# Altium PCB S52最小系统.PcbDoc (part 4 of 9)
Units mm, origin at the board's own origin, x right, y up, seen from the top; angles counter-clockwise.
Board outline 152.4 x 101.6 mm, 2 copper layers (Top Layer, Bottom Layer); 29 components, 53 nets, 176 pads, 2 vias.
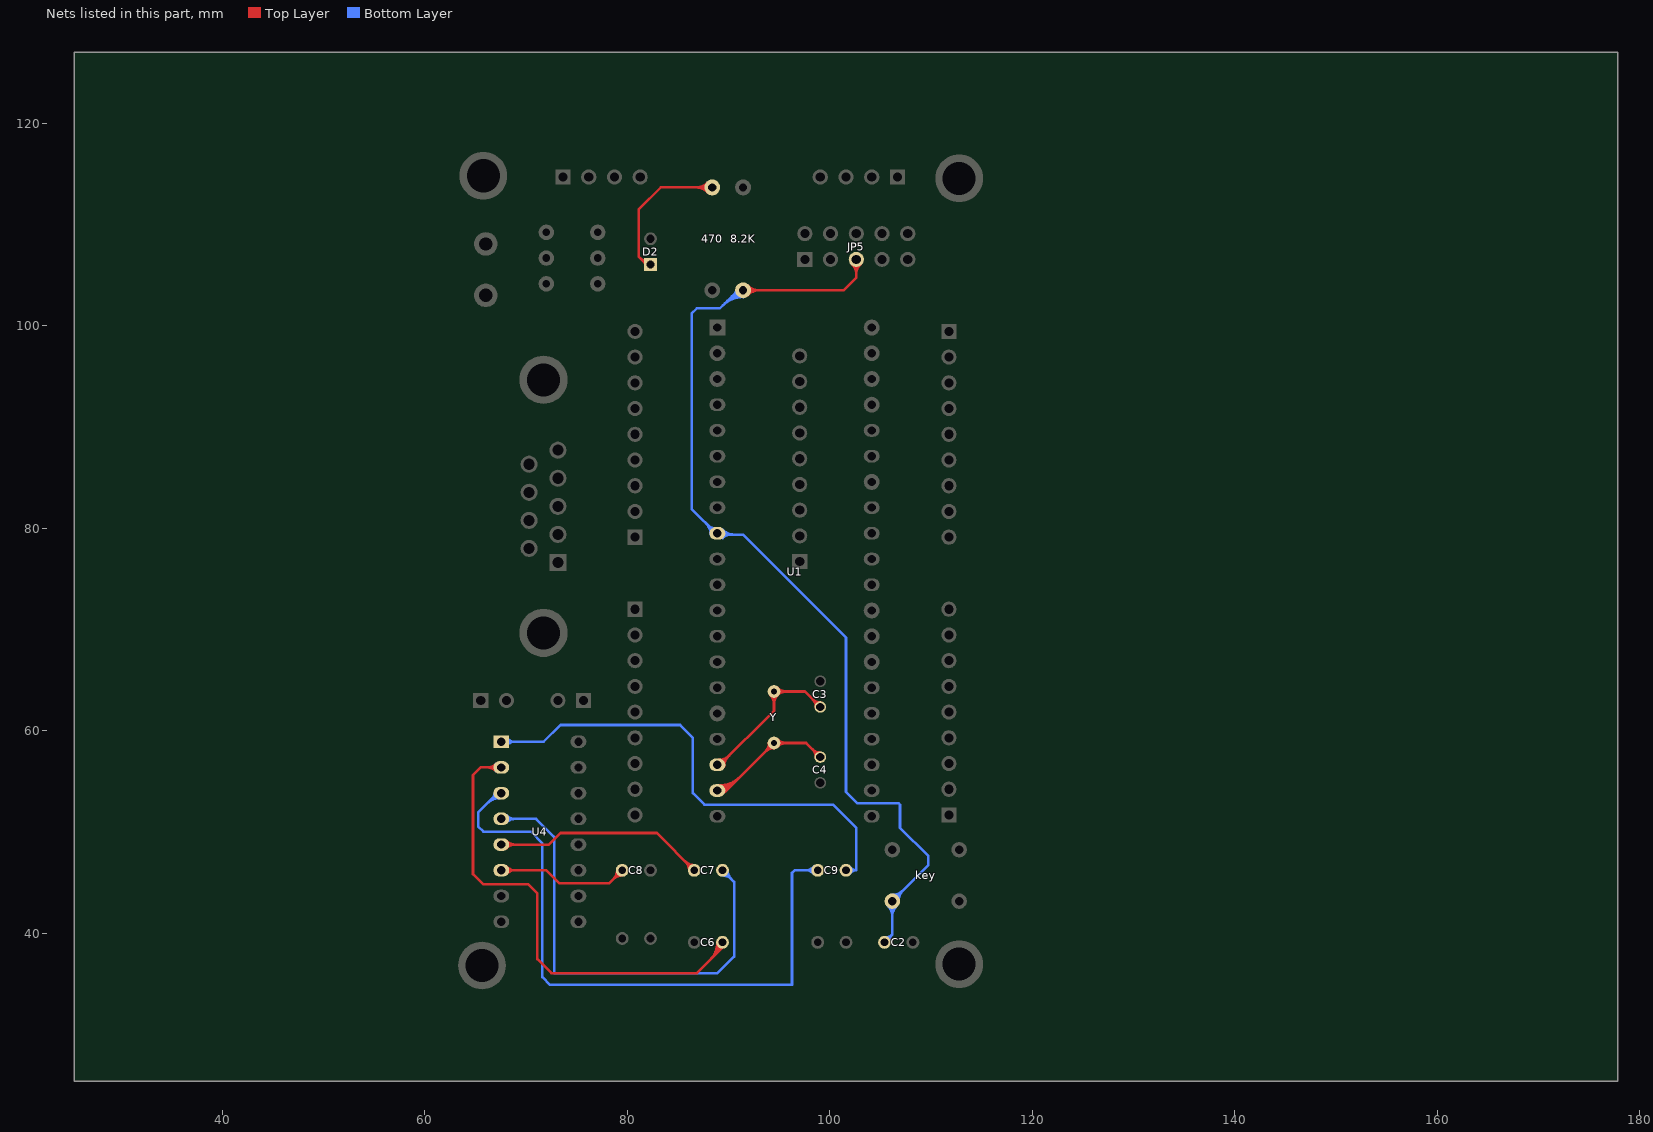
[diagram p4: the nets of this part, all layers, seen from the top]

## Via types
v1: diameter 1.27, hole 0.711, Top Layer to Bottom Layer, 2 vias

## Nets (pads, with @x,y where several pads share a name; then routed paths per layer and width w, separated by ;. In a path a pad name is that pad's centre, name@x,y a point inside that pad or via, vN(x,y) a via of type N, cw(c..) or ccw(c..) an arc to the next point about the centre after c; other vN are vias at no path point) (continued)
NetC2_2: 8.2K.1 C2.2 JP5.5 key.2@106.172,43.18 U1.9 | length 361.3
  Top Layer w0.254: 8.2K.1@91.441,103.501 101.342,103.501 102.616,104.775 JP5.5@102.616,106.553 ; 8.2K.1@91.728,103.214 cw(c92.422,102.52) 92.422,103.501 ; 8.2K.1@91.728,103.214 cw(c92.422,102.52) 92.422,103.501 ; 8.2K.1@91.728,103.214 cw(c92.422,102.52) 92.422,103.501 ; 8.2K.1@91.728,103.214 cw(c92.422,102.52) 92.422,103.501 ; 8.2K.1@91.728,103.214 cw(c92.422,102.52) 92.422,103.501 ; 8.2K.1@91.728,103.214 cw(c92.422,102.52) 92.422,103.501 ; 8.2K.1@91.728,103.214 cw(c92.422,102.52) 92.422,103.501 ; 8.2K.1@91.728,103.214 cw(c92.422,102.52) 92.422,103.501 ; 8.2K.1@91.728,103.214 cw(c92.422,102.52) 92.422,103.501 ; 8.2K.1@91.728,103.214 cw(c92.422,102.52) 92.422,103.501 ; 8.2K.1@91.728,103.789 ccw(c92.422,104.482) 92.422,103.501 ; 8.2K.1@91.728,103.789 ccw(c92.422,104.482) 92.422,103.501 ; 8.2K.1@91.728,103.789 ccw(c92.422,104.482) 92.422,103.501 ; 8.2K.1@91.728,103.789 ccw(c92.422,104.482) 92.422,103.501 ; 8.2K.1@91.728,103.789 ccw(c92.422,104.482) 92.422,103.501 ; 8.2K.1@91.728,103.789 ccw(c92.422,104.482) 92.422,103.501 ; 8.2K.1@91.728,103.789 ccw(c92.422,104.482) 92.422,103.501 ; 8.2K.1@91.728,103.789 ccw(c92.422,104.482) 92.422,103.501 ; 8.2K.1@91.728,103.789 ccw(c92.422,104.482) 92.422,103.501 ; 8.2K.1@91.728,103.789 ccw(c92.422,104.482) 92.422,103.501 ; 8.2K.1@91.908,103.034 cw(c93.035,101.907) 93.035,103.501 ; 8.2K.1@91.908,103.034 cw(c93.035,101.907) 93.035,103.501 ; 8.2K.1@91.908,103.034 cw(c93.035,101.907) 93.035,103.501 ; 8.2K.1@91.908,103.034 cw(c93.035,101.907) 93.035,103.501 ; 8.2K.1@91.908,103.034 cw(c93.035,101.907) 93.035,103.501 ; 8.2K.1@91.908,103.034 cw(c93.035,101.907) 93.035,103.501 ; 8.2K.1@91.908,103.034 cw(c93.035,101.907) 93.035,103.501 ; 8.2K.1@91.908,103.034 cw(c93.035,101.907) 93.035,103.501 ; 8.2K.1@91.908,103.034 cw(c93.035,101.907) 93.035,103.501 ; 8.2K.1@91.908,103.034 cw(c93.035,101.907) 93.035,103.501 ; 8.2K.1@91.908,103.968 ccw(c93.035,105.096) 93.035,103.501 ; 8.2K.1@91.908,103.968 ccw(c93.035,105.096) 93.035,103.501 ; 8.2K.1@91.908,103.968 ccw(c93.035,105.096) 93.035,103.501 ; 8.2K.1@91.908,103.968 ccw(c93.035,105.096) 93.035,103.501 ; 8.2K.1@91.908,103.968 ccw(c93.035,105.096) 93.035,103.501 ; 8.2K.1@91.908,103.968 ccw(c93.035,105.096) 93.035,103.501 ; 8.2K.1@91.908,103.968 ccw(c93.035,105.096) 93.035,103.501 ; 8.2K.1@91.908,103.968 ccw(c93.035,105.096) 93.035,103.501 ; 8.2K.1@91.908,103.968 ccw(c93.035,105.096) 93.035,103.501 ; 8.2K.1@91.908,103.968 ccw(c93.035,105.096) 93.035,103.501 ; JP5.5@102.175,106.112 cw(c101.112,105.049) 102.616,105.049 ; JP5.5@102.175,106.112 cw(c101.112,105.049) 102.616,105.049 ; JP5.5@102.175,106.112 cw(c101.112,105.049) 102.616,105.049 ; JP5.5@102.175,106.112 cw(c101.112,105.049) 102.616,105.049 ; JP5.5@102.175,106.112 cw(c101.112,105.049) 102.616,105.049 ; JP5.5@102.175,106.112 cw(c101.112,105.049) 102.616,105.049 ; JP5.5@102.175,106.112 cw(c101.112,105.049) 102.616,105.049 ; JP5.5@102.175,106.112 cw(c101.112,105.049) 102.616,105.049 ; JP5.5@102.175,106.112 cw(c101.112,105.049) 102.616,105.049 ; JP5.5@102.175,106.112 cw(c101.112,105.049) 102.616,105.049 ; JP5.5@102.355,106.292 cw(c101.725,105.662) 102.616,105.662 ; JP5.5@102.355,106.292 cw(c101.725,105.662) 102.616,105.662 ; JP5.5@102.355,106.292 cw(c101.725,105.662) 102.616,105.662 ; JP5.5@102.355,106.292 cw(c101.725,105.662) 102.616,105.662 ; JP5.5@102.355,106.292 cw(c101.725,105.662) 102.616,105.662 ; JP5.5@102.355,106.292 cw(c101.725,105.662) 102.616,105.662 ; JP5.5@102.355,106.292 cw(c101.725,105.662) 102.616,105.662 ; JP5.5@102.355,106.292 cw(c101.725,105.662) 102.616,105.662 ; JP5.5@102.355,106.292 cw(c101.725,105.662) 102.616,105.662 ; JP5.5@102.355,106.292 cw(c101.725,105.662) 102.616,105.662 ; 102.616,105.049 cw(c104.12,105.049) JP5.5@103.057,106.112 ; 102.616,105.049 cw(c104.12,105.049) JP5.5@103.057,106.112 ; 102.616,105.049 cw(c104.12,105.049) JP5.5@103.057,106.112 ; 102.616,105.049 cw(c104.12,105.049) JP5.5@103.057,106.112 ; 102.616,105.049 cw(c104.12,105.049) JP5.5@103.057,106.112 ; 102.616,105.049 cw(c104.12,105.049) JP5.5@103.057,106.112 ; 102.616,105.049 cw(c104.12,105.049) JP5.5@103.057,106.112 ; 102.616,105.049 cw(c104.12,105.049) JP5.5@103.057,106.112 ; 102.616,105.049 cw(c104.12,105.049) JP5.5@103.057,106.112 ; 102.616,105.049 cw(c104.12,105.049) JP5.5@103.057,106.112 ; 102.616,105.662 cw(c103.507,105.662) JP5.5@102.877,106.292 ; 102.616,105.662 cw(c103.507,105.662) JP5.5@102.877,106.292 ; 102.616,105.662 cw(c103.507,105.662) JP5.5@102.877,106.292 ; 102.616,105.662 cw(c103.507,105.662) JP5.5@102.877,106.292 ; 102.616,105.662 cw(c103.507,105.662) JP5.5@102.877,106.292 ; 102.616,105.662 cw(c103.507,105.662) JP5.5@102.877,106.292 ; 102.616,105.662 cw(c103.507,105.662) JP5.5@102.877,106.292 ; 102.616,105.662 cw(c103.507,105.662) JP5.5@102.877,106.292 ; 102.616,105.662 cw(c103.507,105.662) JP5.5@102.877,106.292 ; 102.616,105.662 cw(c103.507,105.662) JP5.5@102.877,106.292
  Bottom Layer w0.254: 8.2K.1@91.441,103.501 90.928,103.501 89.154,101.727 86.868,101.727 86.36,101.219 86.36,81.91 88.896,79.374 91.441,79.374 101.6,69.215 101.6,53.975 102.743,52.832 106.807,52.832 106.934,52.705 106.934,50.419 109.728,47.625 109.728,46.736 key.2@106.172,43.18 106.172,39.878 ; C2.2@105.41,39.116 106.172,39.878 ; 87.769,80.501 cw(c86.641,79.374) U1.9@88.236,79.374 ; 87.769,80.501 cw(c86.641,79.374) U1.9@88.236,79.374 ; 87.769,80.501 cw(c86.641,79.374) U1.9@88.236,79.374 ; 87.769,80.501 cw(c86.641,79.374) U1.9@88.236,79.374 ; 87.769,80.501 cw(c86.641,79.374) U1.9@88.236,79.374 ; 87.769,80.501 cw(c86.641,79.374) U1.9@88.236,79.374 ; 87.859,80.412 cw(c86.948,79.501) U1.9@88.236,79.501 ; 87.859,80.412 cw(c86.948,79.501) U1.9@88.236,79.501 ; 87.859,80.412 cw(c86.948,79.501) U1.9@88.236,79.501 ; 87.859,80.412 cw(c86.948,79.501) U1.9@88.236,79.501 ; 87.944,80.326 ccw(c88.734,81.116) U1.9@88.734,79.999 ; 87.944,80.326 ccw(c88.734,81.116) U1.9@88.734,79.999 ; 87.944,80.326 ccw(c88.734,81.116) U1.9@88.734,79.999 ; 87.944,80.326 ccw(c88.734,81.116) U1.9@88.734,79.999 ; 88.161,80.109 ccw(c88.734,80.682) U1.9@88.734,79.872 ; 88.161,80.109 ccw(c88.734,80.682) U1.9@88.734,79.872 ; 88.161,80.109 ccw(c88.734,80.682) U1.9@88.734,79.872 ; 88.161,80.109 ccw(c88.734,80.682) U1.9@88.734,79.872 ; 88.161,80.109 ccw(c88.734,80.682) U1.9@88.734,79.872 ; 88.161,80.109 ccw(c88.734,80.682) U1.9@88.734,79.872 ; 88.202,80.068 cw(c87.509,79.374) U1.9@88.49,79.374 ; 88.202,80.068 cw(c87.509,79.374) U1.9@88.49,79.374 ; 88.202,80.068 cw(c87.509,79.374) U1.9@88.49,79.374 ; 88.202,80.068 cw(c87.509,79.374) U1.9@88.49,79.374 ; 88.202,80.068 cw(c87.509,79.374) U1.9@88.49,79.374 ; 88.202,80.068 cw(c87.509,79.374) U1.9@88.49,79.374 ; 88.292,79.978 cw(c87.815,79.501) U1.9@88.49,79.501 ; 88.292,79.978 cw(c87.815,79.501) U1.9@88.49,79.501 ; 88.292,79.978 cw(c87.815,79.501) U1.9@88.49,79.501 ; 88.292,79.978 cw(c87.815,79.501) U1.9@88.49,79.501 ; U1.9@89.231,79.674 ccw(c89.954,80.397) 89.954,79.374 ; U1.9@89.231,79.674 ccw(c89.954,80.397) 89.954,79.374 ; U1.9@89.231,79.674 ccw(c89.954,80.397) 89.954,79.374 ; U1.9@89.231,79.674 ccw(c89.954,80.397) 89.954,79.374 ; U1.9@89.411,79.022 cw(c90.261,78.172) 90.261,79.374 ; U1.9@89.411,79.022 cw(c90.261,78.172) 90.261,79.374 ; U1.9@89.411,79.022 cw(c90.261,78.172) 90.261,79.374 ; U1.9@89.411,79.022 cw(c90.261,78.172) 90.261,79.374 ; U1.9@89.411,79.022 cw(c90.261,78.172) 90.261,79.374 ; U1.9@89.411,79.022 cw(c90.261,78.172) 90.261,79.374 ; U1.9@89.411,79.149 cw(c89.954,78.605) 89.954,79.374 ; U1.9@89.411,79.149 cw(c89.954,78.605) 89.954,79.374 ; U1.9@89.411,79.149 cw(c89.954,78.605) 89.954,79.374 ; U1.9@89.411,79.149 cw(c89.954,78.605) 89.954,79.374 ; U1.9@89.411,79.726 ccw(c90.261,80.576) 90.261,79.374 ; U1.9@89.411,79.726 ccw(c90.261,80.576) 90.261,79.374 ; U1.9@89.411,79.726 ccw(c90.261,80.576) 90.261,79.374 ; U1.9@89.411,79.726 ccw(c90.261,80.576) 90.261,79.374 ; U1.9@89.411,79.726 ccw(c90.261,80.576) 90.261,79.374 ; U1.9@89.411,79.726 ccw(c90.261,80.576) 90.261,79.374 ; U1.9@89.411,79.853 ccw(c90.567,81.01) 90.567,79.374 ; U1.9@89.411,79.853 ccw(c90.567,81.01) 90.567,79.374 ; U1.9@89.411,79.853 ccw(c90.567,81.01) 90.567,79.374 ; U1.9@89.411,79.853 ccw(c90.567,81.01) 90.567,79.374 ; 89.438,102.011 cw(c91.441,100.008) 8.2K.1@91.441,102.841 ; 89.438,102.011 cw(c91.441,100.008) 8.2K.1@91.441,102.841 ; 89.438,102.011 cw(c91.441,100.008) 8.2K.1@91.441,102.841 ; 89.438,102.011 cw(c91.441,100.008) 8.2K.1@91.441,102.841 ; 89.438,102.011 cw(c91.441,100.008) 8.2K.1@91.441,102.841 ; 89.438,102.011 cw(c91.441,100.008) 8.2K.1@91.441,102.841 ; 89.438,102.011 cw(c91.441,100.008) 8.2K.1@91.441,102.841 ; 89.438,102.011 cw(c91.441,100.008) 8.2K.1@91.441,102.841 ; 89.438,102.011 cw(c91.441,100.008) 8.2K.1@91.441,102.841 ; 89.438,102.011 cw(c91.441,100.008) 8.2K.1@91.441,102.841 ; 89.872,102.445 cw(c91.441,100.876) 8.2K.1@91.441,103.095 ; 89.872,102.445 cw(c91.441,100.876) 8.2K.1@91.441,103.095 ; 89.872,102.445 cw(c91.441,100.876) 8.2K.1@91.441,103.095 ; 89.872,102.445 cw(c91.441,100.876) 8.2K.1@91.441,103.095 ; 89.872,102.445 cw(c91.441,100.876) 8.2K.1@91.441,103.095 ; 89.872,102.445 cw(c91.441,100.876) 8.2K.1@91.441,103.095 ; 89.872,102.445 cw(c91.441,100.876) 8.2K.1@91.441,103.095 ; 89.872,102.445 cw(c91.441,100.876) 8.2K.1@91.441,103.095 ; 89.872,102.445 cw(c91.441,100.876) 8.2K.1@91.441,103.095 ; 89.872,102.445 cw(c91.441,100.876) 8.2K.1@91.441,103.095 ; 90.305,102.878 cw(c91.441,101.743) 8.2K.1@91.441,103.349 ; 90.305,102.878 cw(c91.441,101.743) 8.2K.1@91.441,103.349 ; 90.305,102.878 cw(c91.441,101.743) 8.2K.1@91.441,103.349 ; 90.305,102.878 cw(c91.441,101.743) 8.2K.1@91.441,103.349 ; 90.305,102.878 cw(c91.441,101.743) 8.2K.1@91.441,103.349 ; 90.305,102.878 cw(c91.441,101.743) 8.2K.1@91.441,103.349 ; 90.305,102.878 cw(c91.441,101.743) 8.2K.1@91.441,103.349 ; 90.305,102.878 cw(c91.441,101.743) 8.2K.1@91.441,103.349 ; 90.305,102.878 cw(c91.441,101.743) 8.2K.1@91.441,103.349 ; 90.305,102.878 cw(c91.441,101.743) 8.2K.1@91.441,103.349 ; 90.676,103.249 ccw(c90.424,103.501) 8.2K.1@90.781,103.501 ; 90.676,103.249 ccw(c90.424,103.501) 8.2K.1@90.781,103.501 ; 90.676,103.249 ccw(c90.424,103.501) 8.2K.1@90.781,103.501 ; 90.676,103.249 ccw(c90.424,103.501) 8.2K.1@90.781,103.501 ; 90.676,103.249 ccw(c90.424,103.501) 8.2K.1@90.781,103.501 ; 90.676,103.249 ccw(c90.424,103.501) 8.2K.1@90.781,103.501 ; 90.676,103.249 ccw(c90.424,103.501) 8.2K.1@90.781,103.501 ; 90.676,103.249 ccw(c90.424,103.501) 8.2K.1@90.781,103.501 ; 90.676,103.249 ccw(c90.424,103.501) 8.2K.1@90.781,103.501 ; 90.676,103.249 ccw(c90.424,103.501) 8.2K.1@90.781,103.501 ; C2.2@105.459,39.622 ccw(c105.543,40.507) 106.172,39.878 ; C2.2@105.459,39.622 ccw(c105.543,40.507) 106.172,39.878 ; C2.2@105.459,39.622 ccw(c105.543,40.507) 106.172,39.878 ; C2.2@105.459,39.622 ccw(c105.543,40.507) 106.172,39.878 ; C2.2@105.459,39.622 ccw(c105.543,40.507) 106.172,39.878 ; C2.2@105.459,39.622 ccw(c105.543,40.507) 106.172,39.878 ; C2.2@105.459,39.622 ccw(c105.543,40.507) 106.172,39.878 ; C2.2@105.459,39.622 ccw(c105.543,40.507) 106.172,39.878 ; C2.2@105.459,39.622 ccw(c105.543,40.507) 106.172,39.878 ; key.2@105.723,42.731 cw(c104.639,41.647) 106.172,41.647 ; key.2@105.723,42.731 cw(c104.639,41.647) 106.172,41.647 ; key.2@105.723,42.731 cw(c104.639,41.647) 106.172,41.647 ; key.2@105.723,42.731 cw(c104.639,41.647) 106.172,41.647 ; key.2@105.723,42.731 cw(c104.639,41.647) 106.172,41.647 ; key.2@105.723,42.731 cw(c104.639,41.647) 106.172,41.647 ; key.2@105.723,42.731 cw(c104.639,41.647) 106.172,41.647 ; key.2@105.723,42.731 cw(c104.639,41.647) 106.172,41.647 ; key.2@105.723,42.731 cw(c104.639,41.647) 106.172,41.647 ; key.2@105.903,42.911 cw(c105.252,42.26) 106.172,42.26 ; key.2@105.903,42.911 cw(c105.252,42.26) 106.172,42.26 ; key.2@105.903,42.911 cw(c105.252,42.26) 106.172,42.26 ; key.2@105.903,42.911 cw(c105.252,42.26) 106.172,42.26 ; key.2@105.903,42.911 cw(c105.252,42.26) 106.172,42.26 ; key.2@105.903,42.911 cw(c105.252,42.26) 106.172,42.26 ; key.2@105.903,42.911 cw(c105.252,42.26) 106.172,42.26 ; key.2@105.903,42.911 cw(c105.252,42.26) 106.172,42.26 ; key.2@105.903,42.911 cw(c105.252,42.26) 106.172,42.26 ; C2.2@105.916,39.165 cw(c106.801,39.249) 106.172,39.878 ; C2.2@105.916,39.165 cw(c106.801,39.249) 106.172,39.878 ; C2.2@105.916,39.165 cw(c106.801,39.249) 106.172,39.878 ; C2.2@105.916,39.165 cw(c106.801,39.249) 106.172,39.878 ; C2.2@105.916,39.165 cw(c106.801,39.249) 106.172,39.878 ; C2.2@105.916,39.165 cw(c106.801,39.249) 106.172,39.878 ; C2.2@105.916,39.165 cw(c106.801,39.249) 106.172,39.878 ; C2.2@105.916,39.165 cw(c106.801,39.249) 106.172,39.878 ; C2.2@105.916,39.165 cw(c106.801,39.249) 106.172,39.878 ; 106.172,41.647 cw(c107.705,41.647) key.2@106.621,42.731 ; 106.172,41.647 cw(c107.705,41.647) key.2@106.621,42.731 ; 106.172,41.647 cw(c107.705,41.647) key.2@106.621,42.731 ; 106.172,41.647 cw(c107.705,41.647) key.2@106.621,42.731 ; 106.172,41.647 cw(c107.705,41.647) key.2@106.621,42.731 ; 106.172,41.647 cw(c107.705,41.647) key.2@106.621,42.731 ; 106.172,41.647 cw(c107.705,41.647) key.2@106.621,42.731 ; 106.172,41.647 cw(c107.705,41.647) key.2@106.621,42.731 ; 106.172,41.647 cw(c107.705,41.647) key.2@106.621,42.731 ; 106.172,42.26 cw(c107.092,42.26) key.2@106.441,42.911 ; 106.172,42.26 cw(c107.092,42.26) key.2@106.441,42.911 ; 106.172,42.26 cw(c107.092,42.26) key.2@106.441,42.911 ; 106.172,42.26 cw(c107.092,42.26) key.2@106.441,42.911 ; 106.172,42.26 cw(c107.092,42.26) key.2@106.441,42.911 ; 106.172,42.26 cw(c107.092,42.26) key.2@106.441,42.911 ; 106.172,42.26 cw(c107.092,42.26) key.2@106.441,42.911 ; 106.172,42.26 cw(c107.092,42.26) key.2@106.441,42.911 ; 106.172,42.26 cw(c107.092,42.26) key.2@106.441,42.911 ; key.2@106.172,43.561 ccw(c106.172,44.481) 106.822,43.83 ; key.2@106.172,43.561 ccw(c106.172,44.481) 106.822,43.83 ; key.2@106.172,43.561 ccw(c106.172,44.481) 106.822,43.83 ; key.2@106.172,43.561 ccw(c106.172,44.481) 106.822,43.83 ; key.2@106.172,43.561 ccw(c106.172,44.481) 106.822,43.83 ; key.2@106.172,43.561 ccw(c106.172,44.481) 106.822,43.83 ; key.2@106.172,43.561 ccw(c106.172,44.481) 106.822,43.83 ; key.2@106.172,43.561 ccw(c106.172,44.481) 106.822,43.83 ; key.2@106.172,43.561 ccw(c106.172,44.481) 106.822,43.83 ; key.2@106.172,43.815 ccw(c106.172,45.348) 107.256,44.264 ; key.2@106.172,43.815 ccw(c106.172,45.348) 107.256,44.264 ; key.2@106.172,43.815 ccw(c106.172,45.348) 107.256,44.264 ; key.2@106.172,43.815 ccw(c106.172,45.348) 107.256,44.264 ; key.2@106.172,43.815 ccw(c106.172,45.348) 107.256,44.264 ; key.2@106.172,43.815 ccw(c106.172,45.348) 107.256,44.264 ; key.2@106.172,43.815 ccw(c106.172,45.348) 107.256,44.264 ; key.2@106.172,43.815 ccw(c106.172,45.348) 107.256,44.264 ; key.2@106.172,43.815 ccw(c106.172,45.348) 107.256,44.264 ; key.2@106.553,43.18 cw(c107.473,43.18) 106.822,43.83 ; key.2@106.553,43.18 cw(c107.473,43.18) 106.822,43.83 ; key.2@106.553,43.18 cw(c107.473,43.18) 106.822,43.83 ; key.2@106.553,43.18 cw(c107.473,43.18) 106.822,43.83 ; key.2@106.553,43.18 cw(c107.473,43.18) 106.822,43.83 ; key.2@106.553,43.18 cw(c107.473,43.18) 106.822,43.83 ; key.2@106.553,43.18 cw(c107.473,43.18) 106.822,43.83 ; key.2@106.553,43.18 cw(c107.473,43.18) 106.822,43.83 ; key.2@106.553,43.18 cw(c107.473,43.18) 106.822,43.83 ; key.2@106.807,43.18 cw(c108.34,43.18) 107.256,44.264 ; key.2@106.807,43.18 cw(c108.34,43.18) 107.256,44.264 ; key.2@106.807,43.18 cw(c108.34,43.18) 107.256,44.264 ; key.2@106.807,43.18 cw(c108.34,43.18) 107.256,44.264 ; key.2@106.807,43.18 cw(c108.34,43.18) 107.256,44.264 ; key.2@106.807,43.18 cw(c108.34,43.18) 107.256,44.264 ; key.2@106.807,43.18 cw(c108.34,43.18) 107.256,44.264 ; key.2@106.807,43.18 cw(c108.34,43.18) 107.256,44.264 ; key.2@106.807,43.18 cw(c108.34,43.18) 107.256,44.264
NetC3_1: C3.1 U1.18 Y.2 | length 94.9
  Top Layer w0.254: U1.18@88.896,56.514 89.026,56.514 94.488,61.976 Y.2@94.488,63.881 97.536,63.881 C3.1@99.06,62.357 ; U1.18@89.059,56.885 ccw(c89.059,57.702) 89.636,57.124 ; U1.18@89.059,56.885 ccw(c89.059,57.702) 89.636,57.124 ; U1.18@89.059,56.885 ccw(c89.059,57.702) 89.636,57.124 ; U1.18@89.059,56.885 ccw(c89.059,57.702) 89.636,57.124 ; U1.18@89.059,57.012 ccw(c89.059,58.136) 89.853,57.341 ; U1.18@89.059,57.012 ccw(c89.059,58.136) 89.853,57.341 ; U1.18@89.059,57.012 ccw(c89.059,58.136) 89.853,57.341 ; U1.18@89.059,57.012 ccw(c89.059,58.136) 89.853,57.341 ; U1.18@89.059,57.012 ccw(c89.059,58.136) 89.853,57.341 ; U1.18@89.059,57.012 ccw(c89.059,58.136) 89.853,57.341 ; U1.18@89.059,57.139 ccw(c89.059,58.569) 90.07,57.558 ; U1.18@89.059,57.139 ccw(c89.059,58.569) 90.07,57.558 ; U1.18@89.059,57.139 ccw(c89.059,58.569) 90.07,57.558 ; U1.18@89.059,57.139 ccw(c89.059,58.569) 90.07,57.558 ; U1.18@89.303,56.514 cw(c89.97,56.514) U1.18@89.498,56.986 ; U1.18@89.303,56.514 cw(c89.97,56.514) U1.18@89.498,56.986 ; U1.18@89.303,56.514 cw(c89.97,56.514) U1.18@89.498,56.986 ; U1.18@89.303,56.514 cw(c89.97,56.514) U1.18@89.498,56.986 ; U1.18@89.303,56.514 cw(c89.97,56.514) U1.18@89.498,56.986 ; U1.18@89.303,56.514 cw(c89.97,56.514) U1.18@89.498,56.986 ; U1.18@89.557,56.514 cw(c90.838,56.514) 89.932,57.42 ; U1.18@89.557,56.514 cw(c90.838,56.514) 89.932,57.42 ; U1.18@89.557,56.514 cw(c90.838,56.514) 89.932,57.42 ; U1.18@89.557,56.514 cw(c90.838,56.514) 89.932,57.42 ; U1.18@89.557,56.514 cw(c90.838,56.514) 89.932,57.42 ; U1.18@89.557,56.514 cw(c90.838,56.514) 89.932,57.42 ; U1.18@89.557,56.641 cw(c90.531,56.641) 89.842,57.33 ; U1.18@89.557,56.641 cw(c90.531,56.641) 89.842,57.33 ; U1.18@89.557,56.641 cw(c90.531,56.641) 89.842,57.33 ; U1.18@89.557,56.641 cw(c90.531,56.641) 89.842,57.33 ; Y.2@94.129,63.522 cw(c93.262,62.655) 94.488,62.655 ; Y.2@94.129,63.522 cw(c93.262,62.655) 94.488,62.655 ; Y.2@94.129,63.522 cw(c93.262,62.655) 94.488,62.655 ; Y.2@94.129,63.522 cw(c93.262,62.655) 94.488,62.655 ; Y.2@94.129,63.522 cw(c93.262,62.655) 94.488,62.655 ; Y.2@94.129,63.522 cw(c93.262,62.655) 94.488,62.655 ; Y.2@94.129,63.522 cw(c93.262,62.655) 94.488,62.655 ; Y.2@94.129,63.522 cw(c93.262,62.655) 94.488,62.655 ; Y.2@94.129,63.522 cw(c93.262,62.655) 94.488,62.655 ; Y.2@94.129,63.522 cw(c93.262,62.655) 94.488,62.655 ; 94.488,62.655 cw(c95.714,62.655) Y.2@94.847,63.522 ; 94.488,62.655 cw(c95.714,62.655) Y.2@94.847,63.522 ; 94.488,62.655 cw(c95.714,62.655) Y.2@94.847,63.522 ; 94.488,62.655 cw(c95.714,62.655) Y.2@94.847,63.522 ; 94.488,62.655 cw(c95.714,62.655) Y.2@94.847,63.522 ; 94.488,62.655 cw(c95.714,62.655) Y.2@94.847,63.522 ; 94.488,62.655 cw(c95.714,62.655) Y.2@94.847,63.522 ; 94.488,62.655 cw(c95.714,62.655) Y.2@94.847,63.522 ; 94.488,62.655 cw(c95.714,62.655) Y.2@94.847,63.522 ; 94.488,62.655 cw(c95.714,62.655) Y.2@94.847,63.522 ; Y.2@94.847,63.522 cw(c95.714,62.655) 95.714,63.881 ; Y.2@94.847,63.522 cw(c95.714,62.655) 95.714,63.881 ; Y.2@94.847,63.522 cw(c95.714,62.655) 95.714,63.881 ; Y.2@94.847,63.522 cw(c95.714,62.655) 95.714,63.881 ; Y.2@94.847,63.522 cw(c95.714,62.655) 95.714,63.881 ; Y.2@94.847,63.522 cw(c95.714,62.655) 95.714,63.881 ; Y.2@94.847,63.522 cw(c95.714,62.655) 95.714,63.881 ; Y.2@94.847,63.522 cw(c95.714,62.655) 95.714,63.881 ; Y.2@94.847,63.522 cw(c95.714,62.655) 95.714,63.881 ; Y.2@94.847,63.522 cw(c95.714,62.655) 95.714,63.881 ; Y.2@94.847,64.24 ccw(c95.714,65.107) 95.714,63.881 ; Y.2@94.847,64.24 ccw(c95.714,65.107) 95.714,63.881 ; Y.2@94.847,64.24 ccw(c95.714,65.107) 95.714,63.881 ; Y.2@94.847,64.24 ccw(c95.714,65.107) 95.714,63.881 ; Y.2@94.847,64.24 ccw(c95.714,65.107) 95.714,63.881 ; Y.2@94.847,64.24 ccw(c95.714,65.107) 95.714,63.881 ; Y.2@94.847,64.24 ccw(c95.714,65.107) 95.714,63.881 ; Y.2@94.847,64.24 ccw(c95.714,65.107) 95.714,63.881 ; Y.2@94.847,64.24 ccw(c95.714,65.107) 95.714,63.881 ; Y.2@94.847,64.24 ccw(c95.714,65.107) 95.714,63.881 ; 98.301,63.116 cw(c97.542,62.357) C3.1@98.615,62.357 ; 98.301,63.116 ccw(c99.06,63.875) C3.1@99.06,62.801 ; 98.301,63.116 cw(c97.542,62.357) C3.1@98.615,62.357 ; 98.301,63.116 ccw(c99.06,63.875) C3.1@99.06,62.801 ; 98.301,63.116 cw(c97.542,62.357) C3.1@98.615,62.357 ; 98.301,63.116 ccw(c99.06,63.875) C3.1@99.06,62.801 ; 98.301,63.116 ccw(c99.06,63.875) C3.1@99.06,62.801 ; 98.301,63.116 cw(c97.542,62.357) C3.1@98.615,62.357 ; 98.301,63.116 ccw(c99.06,63.875) C3.1@99.06,62.801 ; 98.301,63.116 cw(c97.542,62.357) C3.1@98.615,62.357 ; 98.301,63.116 ccw(c99.06,63.875) C3.1@99.06,62.801 ; 98.301,63.116 cw(c97.542,62.357) C3.1@98.615,62.357 ; 98.301,63.116 ccw(c99.06,63.875) C3.1@99.06,62.801 ; 98.301,63.116 cw(c97.542,62.357) C3.1@98.615,62.357 ; 98.301,63.116 ccw(c99.06,63.875) C3.1@99.06,62.801 ; 98.301,63.116 cw(c97.542,62.357) C3.1@98.615,62.357 ; 98.301,63.116 ccw(c99.06,63.875) C3.1@99.06,62.801 ; 98.301,63.116 cw(c97.542,62.357) C3.1@98.615,62.357 ; 98.301,63.116 ccw(c99.06,63.875) C3.1@99.06,62.801 ; 98.301,63.116 cw(c97.542,62.357) C3.1@98.615,62.357
NetC4_1: C4.1 U1.19 Y.1 | length 122.7
  Top Layer w0.254: U1.19@88.896,53.974 89.661,53.974 Y.1@94.488,58.801 97.663,58.801 C4.1@99.06,57.404 ; U1.19@89.059,53.837 ccw(c89.059,54.961) 89.853,54.166 ; U1.19@89.059,53.837 ccw(c89.059,54.961) 89.853,54.166 ; U1.19@89.059,53.837 ccw(c89.059,54.961) 89.853,54.166 ; U1.19@89.059,53.837 ccw(c89.059,54.961) 89.853,54.166 ; U1.19@89.059,53.964 ccw(c89.059,55.394) 90.07,54.383 ; U1.19@89.059,53.964 ccw(c89.059,55.394) 90.07,54.383 ; U1.19@89.059,53.964 ccw(c89.059,55.394) 90.07,54.383 ; U1.19@89.059,53.964 ccw(c89.059,55.394) 90.07,54.383 ; U1.19@89.059,53.964 ccw(c89.059,55.394) 90.07,54.383 ; U1.19@89.059,53.964 ccw(c89.059,55.394) 90.07,54.383 ; U1.19@89.059,54.091 ccw(c89.059,55.828) 90.287,54.6 ; U1.19@89.059,54.091 ccw(c89.059,55.828) 90.287,54.6 ; U1.19@89.059,54.091 ccw(c89.059,55.828) 90.287,54.6 ; U1.19@89.059,54.091 ccw(c89.059,55.828) 90.287,54.6 ; U1.19@89.059,54.218 ccw(c89.059,56.261) 90.504,54.817 ; U1.19@89.059,54.218 ccw(c89.059,56.261) 90.504,54.817 ; U1.19@89.059,54.218 ccw(c89.059,56.261) 90.504,54.817 ; U1.19@89.059,54.218 ccw(c89.059,56.261) 90.504,54.817 ; U1.19@89.059,54.218 ccw(c89.059,56.261) 90.504,54.817 ; U1.19@89.059,54.218 ccw(c89.059,56.261) 90.504,54.817 ; U1.19@89.059,54.345 ccw(c89.059,56.695) 90.72,55.033 ; U1.19@89.059,54.345 ccw(c89.059,56.695) 90.72,55.033 ; U1.19@89.059,54.345 ccw(c89.059,56.695) 90.72,55.033 ; U1.19@89.059,54.345 ccw(c89.059,56.695) 90.72,55.033 ; U1.19@89.059,54.472 ccw(c89.059,57.129) 90.937,55.25 ; U1.19@89.059,54.472 ccw(c89.059,57.129) 90.937,55.25 ; U1.19@89.059,54.472 ccw(c89.059,57.129) 90.937,55.25 ; U1.19@89.059,54.472 ccw(c89.059,57.129) 90.937,55.25 ; U1.19@89.059,54.472 ccw(c89.059,57.129) 90.937,55.25 ; U1.19@89.059,54.472 ccw(c89.059,57.129) 90.937,55.25 ; U1.19@89.059,54.599 ccw(c89.059,57.562) 91.154,55.467 ; U1.19@89.059,54.599 ccw(c89.059,57.562) 91.154,55.467 ; U1.19@89.059,54.599 ccw(c89.059,57.562) 91.154,55.467 ; U1.19@89.059,54.599 ccw(c89.059,57.562) 91.154,55.467 ; 93.621,57.934 cw(c94.488,57.067) Y.1@94.488,58.293 ; 93.621,57.934 ccw(c92.754,58.801) Y.1@93.98,58.801 ; 93.621,57.934 cw(c94.488,57.067) Y.1@94.488,58.293 ; 93.621,57.934 ccw(c92.754,58.801) Y.1@93.98,58.801 ; 93.621,57.934 cw(c94.488,57.067) Y.1@94.488,58.293 ; 93.621,57.934 ccw(c92.754,58.801) Y.1@93.98,58.801 ; 93.621,57.934 ccw(c92.754,58.801) Y.1@93.98,58.801 ; 93.621,57.934 cw(c94.488,57.067) Y.1@94.488,58.293 ; 93.621,57.934 ccw(c92.754,58.801) Y.1@93.98,58.801 ; 93.621,57.934 cw(c94.488,57.067) Y.1@94.488,58.293 ; 93.621,57.934 ccw(c92.754,58.801) Y.1@93.98,58.801 ; 93.621,57.934 cw(c94.488,57.067) Y.1@94.488,58.293 ; 93.621,57.934 ccw(c92.754,58.801) Y.1@93.98,58.801 ; 93.621,57.934 cw(c94.488,57.067) Y.1@94.488,58.293 ; 93.621,57.934 ccw(c92.754,58.801) Y.1@93.98,58.801 ; 93.621,57.934 cw(c94.488,57.067) Y.1@94.488,58.293 ; 93.621,57.934 ccw(c92.754,58.801) Y.1@93.98,58.801 ; 93.621,57.934 cw(c94.488,57.067) Y.1@94.488,58.293 ; 93.621,57.934 ccw(c92.754,58.801) Y.1@93.98,58.801 ; 93.621,57.934 cw(c94.488,57.067) Y.1@94.488,58.293 ; Y.1@94.847,58.442 cw(c95.714,57.575) 95.714,58.801 ; Y.1@94.847,58.442 cw(c95.714,57.575) 95.714,58.801 ; Y.1@94.847,58.442 cw(c95.714,57.575) 95.714,58.801 ; Y.1@94.847,58.442 cw(c95.714,57.575) 95.714,58.801 ; Y.1@94.847,58.442 cw(c95.714,57.575) 95.714,58.801 ; Y.1@94.847,58.442 cw(c95.714,57.575) 95.714,58.801 ; Y.1@94.847,58.442 cw(c95.714,57.575) 95.714,58.801 ; Y.1@94.847,58.442 cw(c95.714,57.575) 95.714,58.801 ; Y.1@94.847,58.442 cw(c95.714,57.575) 95.714,58.801 ; Y.1@94.847,58.442 cw(c95.714,57.575) 95.714,58.801 ; Y.1@94.847,59.16 ccw(c95.714,60.027) 95.714,58.801 ; Y.1@94.847,59.16 ccw(c95.714,60.027) 95.714,58.801 ; Y.1@94.847,59.16 ccw(c95.714,60.027) 95.714,58.801 ; Y.1@94.847,59.16 ccw(c95.714,60.027) 95.714,58.801 ; Y.1@94.847,59.16 ccw(c95.714,60.027) 95.714,58.801 ; Y.1@94.847,59.16 ccw(c95.714,60.027) 95.714,58.801 ; Y.1@94.847,59.16 ccw(c95.714,60.027) 95.714,58.801 ; Y.1@94.847,59.16 ccw(c95.714,60.027) 95.714,58.801 ; Y.1@94.847,59.16 ccw(c95.714,60.027) 95.714,58.801 ; Y.1@94.847,59.16 ccw(c95.714,60.027) 95.714,58.801 ; 98.301,58.163 cw(c97.542,57.404) C4.1@98.615,57.404 ; 98.301,58.163 ccw(c99.06,58.922) C4.1@99.06,57.848 ; 98.301,58.163 cw(c97.542,57.404) C4.1@98.615,57.404 ; 98.301,58.163 ccw(c99.06,58.922) C4.1@99.06,57.848 ; 98.301,58.163 cw(c97.542,57.404) C4.1@98.615,57.404 ; 98.301,58.163 ccw(c99.06,58.922) C4.1@99.06,57.848 ; 98.301,58.163 ccw(c99.06,58.922) C4.1@99.06,57.848 ; 98.301,58.163 cw(c97.542,57.404) C4.1@98.615,57.404 ; 98.301,58.163 ccw(c99.06,58.922) C4.1@99.06,57.848 ; 98.301,58.163 cw(c97.542,57.404) C4.1@98.615,57.404 ; 98.301,58.163 ccw(c99.06,58.922) C4.1@99.06,57.848 ; 98.301,58.163 cw(c97.542,57.404) C4.1@98.615,57.404 ; 98.301,58.163 ccw(c99.06,58.922) C4.1@99.06,57.848 ; 98.301,58.163 cw(c97.542,57.404) C4.1@98.615,57.404 ; 98.301,58.163 ccw(c99.06,58.922) C4.1@99.06,57.848 ; 98.301,58.163 cw(c97.542,57.404) C4.1@98.615,57.404 ; 98.301,58.163 ccw(c99.06,58.922) C4.1@99.06,57.848 ; 98.301,58.163 cw(c97.542,57.404) C4.1@98.615,57.404 ; 98.301,58.163 ccw(c99.06,58.922) C4.1@99.06,57.848 ; 98.301,58.163 cw(c97.542,57.404) C4.1@98.615,57.404
NetC6_1: C6.1 U4.2 | length 106.7
  Top Layer w0.254: U4.2@67.56,56.387 65.531,56.387 64.77,55.626 64.77,45.847 65.786,44.831 70.231,44.831 71.12,43.942 71.12,37.465 72.517,36.068 86.868,36.068 C6.1@89.408,38.608 ; C6.1@89.103,39.218 cw(c88.646,38.608) C6.1@89.408,38.608 ; C6.1@89.408,39.624 C6.1@89.408,38.608 ; C6.1@89.713,39.218 ccw(c90.17,38.608) C6.1@89.408,38.608 ; 66.196,56.387 cw(c66.196,55.185) U4.2@67.046,56.035 ; 66.196,56.387 ccw(c66.196,57.589) U4.2@67.046,56.739 ; 66.196,56.387 cw(c66.196,55.185) U4.2@67.046,56.035 ; 66.196,56.387 ccw(c66.196,57.589) U4.2@67.046,56.739 ; 66.196,56.387 cw(c66.196,55.185) U4.2@67.046,56.035 ; 66.196,56.387 ccw(c66.196,57.589) U4.2@67.046,56.739 ; 66.196,56.387 ccw(c66.196,57.589) U4.2@67.046,56.739 ; 66.196,56.387 cw(c66.196,55.185) U4.2@67.046,56.035 ; 66.196,56.387 ccw(c66.196,57.589) U4.2@67.046,56.739 ; 66.196,56.387 cw(c66.196,55.185) U4.2@67.046,56.035 ; 66.196,56.387 ccw(c66.196,57.589) U4.2@67.046,56.739 ; 66.196,56.387 cw(c66.196,55.185) U4.2@67.046,56.035 ; 66.196,56.387 ccw(c66.196,57.589) U4.2@67.046,56.739 ; 66.196,56.387 cw(c66.196,55.185) U4.2@67.046,56.035 ; 66.196,56.387 ccw(c66.196,57.589) U4.2@67.046,56.739 ; 66.196,56.387 cw(c66.196,55.185) U4.2@67.046,56.035 ; 66.196,56.387 ccw(c66.196,57.589) U4.2@67.046,56.739 ; 66.196,56.387 cw(c66.196,55.185) U4.2@67.046,56.035 ; 66.196,56.387 ccw(c66.196,57.589) U4.2@67.046,56.739 ; 66.196,56.387 cw(c66.196,55.185) U4.2@67.046,56.035 ; 88.182,37.382 ccw(c86.447,39.116) C6.1@88.9,39.116 ; 88.182,37.382 ccw(c86.447,39.116) C6.1@88.9,39.116 ; 88.182,37.382 ccw(c86.447,39.116) C6.1@88.9,39.116 ; 88.182,37.382 ccw(c86.447,39.116) C6.1@88.9,39.116 ; 88.182,37.382 ccw(c86.447,39.116) C6.1@88.9,39.116 ; 88.182,37.382 ccw(c86.447,39.116) C6.1@88.9,39.116 ; 88.182,37.382 ccw(c86.447,39.116) C6.1@88.9,39.116 ; 88.182,37.382 ccw(c86.447,39.116) C6.1@88.9,39.116 ; 88.182,37.382 ccw(c86.447,39.116) C6.1@88.9,39.116 ; 88.615,37.815 ccw(c87.314,39.116) C6.1@89.154,39.116 ; 88.615,37.815 ccw(c87.314,39.116) C6.1@89.154,39.116 ; 88.615,37.815 ccw(c87.314,39.116) C6.1@89.154,39.116 ; 88.615,37.815 ccw(c87.314,39.116) C6.1@89.154,39.116 ; 88.615,37.815 ccw(c87.314,39.116) C6.1@89.154,39.116 ; 88.615,37.815 ccw(c87.314,39.116) C6.1@89.154,39.116 ; 88.615,37.815 ccw(c87.314,39.116) C6.1@89.154,39.116 ; 88.615,37.815 ccw(c87.314,39.116) C6.1@89.154,39.116 ; 88.615,37.815 ccw(c87.314,39.116) C6.1@89.154,39.116 ; 89.049,38.249 ccw(c88.182,39.116) C6.1@89.408,39.116 ; 89.049,38.249 ccw(c88.182,39.116) C6.1@89.408,39.116 ; 89.049,38.249 ccw(c88.182,39.116) C6.1@89.408,39.116 ; 89.049,38.249 ccw(c88.182,39.116) C6.1@89.408,39.116 ; 89.049,38.249 ccw(c88.182,39.116) C6.1@89.408,39.116 ; 89.049,38.249 ccw(c88.182,39.116) C6.1@89.408,39.116 ; 89.049,38.249 ccw(c88.182,39.116) C6.1@89.408,39.116 ; 89.049,38.249 ccw(c88.182,39.116) C6.1@89.408,39.116 ; 89.049,38.249 ccw(c88.182,39.116) C6.1@89.408,39.116
NetC7_1: C7.1 U4.4 | length 85.3
  Top Layer w0.254: U4.4@67.56,51.05 U4.4@67.56,51.307
  Bottom Layer w0.254: U4.4@67.56,51.307 70.994,51.307 72.771,49.53 72.771,36.068 88.9,36.068 90.551,37.719 90.551,45.085 C7.1@89.408,46.228 ; U4.4@68.075,50.955 cw(c68.925,50.105) 68.925,51.307 ; U4.4@68.075,50.955 cw(c68.925,50.105) 68.925,51.307 ; U4.4@68.075,50.955 cw(c68.925,50.105) 68.925,51.307 ; U4.4@68.075,50.955 cw(c68.925,50.105) 68.925,51.307 ; U4.4@68.075,50.955 cw(c68.925,50.105) 68.925,51.307 ; U4.4@68.075,50.955 cw(c68.925,50.105) 68.925,51.307 ; U4.4@68.075,50.955 cw(c68.925,50.105) 68.925,51.307 ; U4.4@68.075,50.955 cw(c68.925,50.105) 68.925,51.307 ; U4.4@68.075,50.955 cw(c68.925,50.105) 68.925,51.307 ; U4.4@68.075,50.955 cw(c68.925,50.105) 68.925,51.307 ; U4.4@68.075,51.659 ccw(c68.925,52.509) 68.925,51.307 ; U4.4@68.075,51.659 ccw(c68.925,52.509) 68.925,51.307 ; U4.4@68.075,51.659 ccw(c68.925,52.509) 68.925,51.307 ; U4.4@68.075,51.659 ccw(c68.925,52.509) 68.925,51.307 ; U4.4@68.075,51.659 ccw(c68.925,52.509) 68.925,51.307 ; U4.4@68.075,51.659 ccw(c68.925,52.509) 68.925,51.307 ; U4.4@68.075,51.659 ccw(c68.925,52.509) 68.925,51.307 ; U4.4@68.075,51.659 ccw(c68.925,52.509) 68.925,51.307 ; U4.4@68.075,51.659 ccw(c68.925,52.509) 68.925,51.307 ; U4.4@68.075,51.659 ccw(c68.925,52.509) 68.925,51.307 ; C7.1@89.408,45.72 cw(c89.408,44.494) 90.275,45.361 ; C7.1@89.408,45.72 cw(c89.408,44.494) 90.275,45.361 ; C7.1@89.408,45.72 cw(c89.408,44.494) 90.275,45.361 ; C7.1@89.408,45.72 cw(c89.408,44.494) 90.275,45.361 ; C7.1@89.408,45.72 cw(c89.408,44.494) 90.275,45.361 ; C7.1@89.408,45.72 cw(c89.408,44.494) 90.275,45.361 ; C7.1@89.408,45.72 cw(c89.408,44.494) 90.275,45.361 ; C7.1@89.408,45.72 cw(c89.408,44.494) 90.275,45.361 ; C7.1@89.408,45.72 cw(c89.408,44.494) 90.275,45.361 ; C7.1@89.408,45.72 cw(c89.408,44.494) 90.275,45.361 ; C7.1@89.916,46.228 ccw(c91.142,46.228) 90.275,45.361 ; C7.1@89.916,46.228 ccw(c91.142,46.228) 90.275,45.361 ; C7.1@89.916,46.228 ccw(c91.142,46.228) 90.275,45.361 ; C7.1@89.916,46.228 ccw(c91.142,46.228) 90.275,45.361 ; C7.1@89.916,46.228 ccw(c91.142,46.228) 90.275,45.361 ; C7.1@89.916,46.228 ccw(c91.142,46.228) 90.275,45.361 ; C7.1@89.916,46.228 ccw(c91.142,46.228) 90.275,45.361 ; C7.1@89.916,46.228 ccw(c91.142,46.228) 90.275,45.361 ; C7.1@89.916,46.228 ccw(c91.142,46.228) 90.275,45.361 ; C7.1@89.916,46.228 ccw(c91.142,46.228) 90.275,45.361
NetC7_2: C7.2 U4.5 | length 59.2
  Top Layer w0.254: U4.5@67.56,48.767 72.262,48.767 73.406,49.911 82.931,49.911 C7.2@86.614,46.228 ; U4.5@68.075,48.415 cw(c68.925,47.565) 68.925,48.767 ; U4.5@68.075,48.415 cw(c68.925,47.565) 68.925,48.767 ; U4.5@68.075,48.415 cw(c68.925,47.565) 68.925,48.767 ; U4.5@68.075,48.415 cw(c68.925,47.565) 68.925,48.767 ; U4.5@68.075,48.415 cw(c68.925,47.565) 68.925,48.767 ; U4.5@68.075,48.415 cw(c68.925,47.565) 68.925,48.767 ; U4.5@68.075,48.415 cw(c68.925,47.565) 68.925,48.767 ; U4.5@68.075,48.415 cw(c68.925,47.565) 68.925,48.767 ; U4.5@68.075,48.415 cw(c68.925,47.565) 68.925,48.767 ; U4.5@68.075,48.415 cw(c68.925,47.565) 68.925,48.767 ; U4.5@68.075,49.119 ccw(c68.925,49.969) 68.925,48.767 ; U4.5@68.075,49.119 ccw(c68.925,49.969) 68.925,48.767 ; U4.5@68.075,49.119 ccw(c68.925,49.969) 68.925,48.767 ; U4.5@68.075,49.119 ccw(c68.925,49.969) 68.925,48.767 ; U4.5@68.075,49.119 ccw(c68.925,49.969) 68.925,48.767 ; U4.5@68.075,49.119 ccw(c68.925,49.969) 68.925,48.767 ; U4.5@68.075,49.119 ccw(c68.925,49.969) 68.925,48.767 ; U4.5@68.075,49.119 ccw(c68.925,49.969) 68.925,48.767 ; U4.5@68.075,49.119 ccw(c68.925,49.969) 68.925,48.767 ; U4.5@68.075,49.119 ccw(c68.925,49.969) 68.925,48.767 ; 85.747,47.095 cw(c84.88,46.228) C7.2@86.106,46.228 ; 85.747,47.095 ccw(c86.614,47.962) C7.2@86.614,46.736 ; 85.747,47.095 cw(c84.88,46.228) C7.2@86.106,46.228 ; 85.747,47.095 ccw(c86.614,47.962) C7.2@86.614,46.736 ; 85.747,47.095 cw(c84.88,46.228) C7.2@86.106,46.228 ; 85.747,47.095 ccw(c86.614,47.962) C7.2@86.614,46.736 ; 85.747,47.095 ccw(c86.614,47.962) C7.2@86.614,46.736 ; 85.747,47.095 cw(c84.88,46.228) C7.2@86.106,46.228 ; 85.747,47.095 ccw(c86.614,47.962) C7.2@86.614,46.736 ; 85.747,47.095 cw(c84.88,46.228) C7.2@86.106,46.228 ; 85.747,47.095 ccw(c86.614,47.962) C7.2@86.614,46.736 ; 85.747,47.095 cw(c84.88,46.228) C7.2@86.106,46.228 ; 85.747,47.095 ccw(c86.614,47.962) C7.2@86.614,46.736 ; 85.747,47.095 cw(c84.88,46.228) C7.2@86.106,46.228 ; 85.747,47.095 ccw(c86.614,47.962) C7.2@86.614,46.736 ; 85.747,47.095 cw(c84.88,46.228) C7.2@86.106,46.228 ; 85.747,47.095 ccw(c86.614,47.962) C7.2@86.614,46.736 ; 85.747,47.095 cw(c84.88,46.228) C7.2@86.106,46.228 ; 85.747,47.095 ccw(c86.614,47.962) C7.2@86.614,46.736 ; 85.747,47.095 cw(c84.88,46.228) C7.2@86.106,46.228
NetC8_2: C8.2 U4.6 | length 51.1
  Top Layer w0.254: U4.6@67.56,46.227 72.01,46.227 73.279,44.958 78.232,44.958 C8.2@79.502,46.228 ; U4.6@68.075,45.875 cw(c68.925,45.025) 68.925,46.227 ; U4.6@68.075,45.875 cw(c68.925,45.025) 68.925,46.227 ; U4.6@68.075,45.875 cw(c68.925,45.025) 68.925,46.227 ; U4.6@68.075,45.875 cw(c68.925,45.025) 68.925,46.227 ; U4.6@68.075,45.875 cw(c68.925,45.025) 68.925,46.227 ; U4.6@68.075,45.875 cw(c68.925,45.025) 68.925,46.227 ; U4.6@68.075,45.875 cw(c68.925,45.025) 68.925,46.227 ; U4.6@68.075,45.875 cw(c68.925,45.025) 68.925,46.227 ; U4.6@68.075,45.875 cw(c68.925,45.025) 68.925,46.227 ; U4.6@68.075,45.875 cw(c68.925,45.025) 68.925,46.227 ; U4.6@68.075,46.579 ccw(c68.925,47.429) 68.925,46.227 ; U4.6@68.075,46.579 ccw(c68.925,47.429) 68.925,46.227 ; U4.6@68.075,46.579 ccw(c68.925,47.429) 68.925,46.227 ; U4.6@68.075,46.579 ccw(c68.925,47.429) 68.925,46.227 ; U4.6@68.075,46.579 ccw(c68.925,47.429) 68.925,46.227 ; U4.6@68.075,46.579 ccw(c68.925,47.429) 68.925,46.227 ; U4.6@68.075,46.579 ccw(c68.925,47.429) 68.925,46.227 ; U4.6@68.075,46.579 ccw(c68.925,47.429) 68.925,46.227 ; U4.6@68.075,46.579 ccw(c68.925,47.429) 68.925,46.227 ; U4.6@68.075,46.579 ccw(c68.925,47.429) 68.925,46.227 ; 78.635,45.361 cw(c79.502,44.494) C8.2@79.502,45.72 ; 78.635,45.361 ccw(c77.768,46.228) C8.2@78.994,46.228 ; 78.635,45.361 cw(c79.502,44.494) C8.2@79.502,45.72 ; 78.635,45.361 ccw(c77.768,46.228) C8.2@78.994,46.228 ; 78.635,45.361 cw(c79.502,44.494) C8.2@79.502,45.72 ; 78.635,45.361 ccw(c77.768,46.228) C8.2@78.994,46.228 ; 78.635,45.361 ccw(c77.768,46.228) C8.2@78.994,46.228 ; 78.635,45.361 cw(c79.502,44.494) C8.2@79.502,45.72 ; 78.635,45.361 ccw(c77.768,46.228) C8.2@78.994,46.228 ; 78.635,45.361 cw(c79.502,44.494) C8.2@79.502,45.72 ; 78.635,45.361 ccw(c77.768,46.228) C8.2@78.994,46.228 ; 78.635,45.361 cw(c79.502,44.494) C8.2@79.502,45.72 ; 78.635,45.361 ccw(c77.768,46.228) C8.2@78.994,46.228 ; 78.635,45.361 cw(c79.502,44.494) C8.2@79.502,45.72 ; 78.635,45.361 ccw(c77.768,46.228) C8.2@78.994,46.228 ; 78.635,45.361 cw(c79.502,44.494) C8.2@79.502,45.72 ; 78.635,45.361 ccw(c77.768,46.228) C8.2@78.994,46.228 ; 78.635,45.361 cw(c79.502,44.494) C8.2@79.502,45.72 ; 78.635,45.361 ccw(c77.768,46.228) C8.2@78.994,46.228 ; 78.635,45.361 cw(c79.502,44.494) C8.2@79.502,45.72
NetC9_1: C9.1 U4.1 | length 80
  Bottom Layer w0.254: U4.1@67.56,58.927 71.754,58.927 73.406,60.579 85.217,60.579 86.487,59.309 86.487,53.848 87.63,52.705 100.33,52.705 102.616,50.419 102.616,46.228 ; C9.1@101.6,46.228 102.616,46.228 ; U4.1@68.075,58.575 cw(c68.925,57.725) 68.925,58.927 ; U4.1@68.075,58.575 cw(c68.925,57.725) 68.925,58.927 ; U4.1@68.075,58.575 cw(c68.925,57.725) 68.925,58.927 ; U4.1@68.075,58.575 cw(c68.925,57.725) 68.925,58.927 ; U4.1@68.075,58.575 cw(c68.925,57.725) 68.925,58.927 ; U4.1@68.075,58.575 cw(c68.925,57.725) 68.925,58.927 ; U4.1@68.075,58.575 cw(c68.925,57.725) 68.925,58.927 ; U4.1@68.075,58.575 cw(c68.925,57.725) 68.925,58.927 ; U4.1@68.075,58.575 cw(c68.925,57.725) 68.925,58.927 ; U4.1@68.075,58.575 cw(c68.925,57.725) 68.925,58.927 ; U4.1@68.075,59.279 ccw(c68.925,60.129) 68.925,58.927 ; U4.1@68.075,59.279 ccw(c68.925,60.129) 68.925,58.927 ; U4.1@68.075,59.279 ccw(c68.925,60.129) 68.925,58.927 ; U4.1@68.075,59.279 ccw(c68.925,60.129) 68.925,58.927 ; U4.1@68.075,59.279 ccw(c68.925,60.129) 68.925,58.927 ; U4.1@68.075,59.279 ccw(c68.925,60.129) 68.925,58.927 ; U4.1@68.075,59.279 ccw(c68.925,60.129) 68.925,58.927 ; U4.1@68.075,59.279 ccw(c68.925,60.129) 68.925,58.927 ; U4.1@68.075,59.279 ccw(c68.925,60.129) 68.925,58.927 ; U4.1@68.075,59.279 ccw(c68.925,60.129) 68.925,58.927 ; C9.1@102.006,45.923 cw(c102.616,45.466) 102.616,46.228 ; C9.1@102.006,45.923 cw(c102.616,45.466) 102.616,46.228 ; C9.1@102.006,45.923 cw(c102.616,45.466) 102.616,46.228 ; C9.1@102.006,45.923 cw(c102.616,45.466) 102.616,46.228 ; C9.1@102.006,45.923 cw(c102.616,45.466) 102.616,46.228 ; C9.1@102.006,45.923 cw(c102.616,45.466) 102.616,46.228 ; C9.1@102.006,45.923 cw(c102.616,45.466) 102.616,46.228 ; C9.1@102.006,45.923 cw(c102.616,45.466) 102.616,46.228 ; C9.1@102.006,45.923 cw(c102.616,45.466) 102.616,46.228 ; C9.1@102.006,46.533 ccw(c102.616,46.99) 102.616,46.228 ; C9.1@102.006,46.533 ccw(c102.616,46.99) 102.616,46.228 ; C9.1@102.006,46.533 ccw(c102.616,46.99) 102.616,46.228 ; C9.1@102.006,46.533 ccw(c102.616,46.99) 102.616,46.228 ; C9.1@102.006,46.533 ccw(c102.616,46.99) 102.616,46.228 ; C9.1@102.006,46.533 ccw(c102.616,46.99) 102.616,46.228 ; C9.1@102.006,46.533 ccw(c102.616,46.99) 102.616,46.228 ; C9.1@102.006,46.533 ccw(c102.616,46.99) 102.616,46.228 ; C9.1@102.006,46.533 ccw(c102.616,46.99) 102.616,46.228
NetC9_2: C9.2 U4.3 | length 108.3
  Bottom Layer w0.254: U4.3@67.56,53.847 67.182,53.847 65.278,51.943 65.278,50.546 65.786,50.038 70.485,50.038 71.628,48.895 71.628,35.687 72.39,34.925 96.266,34.925 96.266,45.974 96.52,46.228 C9.2@98.806,46.228 ; 66.179,52.844 cw(c67.398,51.626) U4.3@67.398,53.349 ; 66.179,52.844 cw(c67.398,51.626) U4.3@67.398,53.349 ; 66.179,52.844 cw(c67.398,51.626) U4.3@67.398,53.349 ; 66.179,52.844 cw(c67.398,51.626) U4.3@67.398,53.349 ; 66.179,52.844 cw(c67.398,51.626) U4.3@67.398,53.349 ; 66.179,52.844 cw(c67.398,51.626) U4.3@67.398,53.349 ; 66.179,52.844 cw(c67.398,51.626) U4.3@67.398,53.349 ; 66.179,52.844 cw(c67.398,51.626) U4.3@67.398,53.349 ; 66.179,52.844 cw(c67.398,51.626) U4.3@67.398,53.349 ; 66.179,52.844 cw(c67.398,51.626) U4.3@67.398,53.349 ; 66.613,53.278 cw(c67.398,52.493) U4.3@67.398,53.603 ; 66.613,53.278 cw(c67.398,52.493) U4.3@67.398,53.603 ; 66.613,53.278 cw(c67.398,52.493) U4.3@67.398,53.603 ; 66.613,53.278 cw(c67.398,52.493) U4.3@67.398,53.603 ; 66.613,53.278 cw(c67.398,52.493) U4.3@67.398,53.603 ; 66.613,53.278 cw(c67.398,52.493) U4.3@67.398,53.603 ; 66.613,53.278 cw(c67.398,52.493) U4.3@67.398,53.603 ; 66.613,53.278 cw(c67.398,52.493) U4.3@67.398,53.603 ; 66.613,53.278 cw(c67.398,52.493) U4.3@67.398,53.603 ; 66.613,53.278 cw(c67.398,52.493) U4.3@67.398,53.603 ; 66.7,53.365 ccw(c66.218,53.847) U4.3@66.9,53.847 ; 66.7,53.365 ccw(c66.218,53.847) U4.3@66.9,53.847 ; 66.7,53.365 ccw(c66.218,53.847) U4.3@66.9,53.847 ; 66.7,53.365 ccw(c66.218,53.847) U4.3@66.9,53.847 ; 66.7,53.365 ccw(c66.218,53.847) U4.3@66.9,53.847 ; 66.7,53.365 ccw(c66.218,53.847) U4.3@66.9,53.847 ; 66.7,53.365 ccw(c66.218,53.847) U4.3@66.9,53.847 ; 66.7,53.365 ccw(c66.218,53.847) U4.3@66.9,53.847 ; 66.7,53.365 ccw(c66.218,53.847) U4.3@66.9,53.847 ; 66.7,53.365 ccw(c66.218,53.847) U4.3@66.9,53.847 ; 97.58,46.228 cw(c97.58,45.002) C9.2@98.447,45.869 ; 97.58,46.228 ccw(c97.58,47.454) C9.2@98.447,46.587 ; 97.58,46.228 cw(c97.58,45.002) C9.2@98.447,45.869 ; 97.58,46.228 ccw(c97.58,47.454) C9.2@98.447,46.587 ; 97.58,46.228 ccw(c97.58,47.454) C9.2@98.447,46.587 ; 97.58,46.228 cw(c97.58,45.002) C9.2@98.447,45.869 ; 97.58,46.228 ccw(c97.58,47.454) C9.2@98.447,46.587 ; 97.58,46.228 cw(c97.58,45.002) C9.2@98.447,45.869 ; 97.58,46.228 ccw(c97.58,47.454) C9.2@98.447,46.587 ; 97.58,46.228 cw(c97.58,45.002) C9.2@98.447,45.869 ; 97.58,46.228 ccw(c97.58,47.454) C9.2@98.447,46.587 ; 97.58,46.228 cw(c97.58,45.002) C9.2@98.447,45.869 ; 97.58,46.228 ccw(c97.58,47.454) C9.2@98.447,46.587 ; 97.58,46.228 cw(c97.58,45.002) C9.2@98.447,45.869 ; 97.58,46.228 ccw(c97.58,47.454) C9.2@98.447,46.587 ; 97.58,46.228 cw(c97.58,45.002) C9.2@98.447,45.869 ; 97.58,46.228 ccw(c97.58,47.454) C9.2@98.447,46.587 ; 97.58,46.228 cw(c97.58,45.002) C9.2@98.447,45.869
NetD2_1: 470.2 D2.1 | length 71.4
  Top Layer w0.254: D2.1@82.296,106.045 81.915,106.045 81.153,106.807 81.153,111.506 83.308,113.661 470.2@88.393,113.661 ; 81.344,106.616 ccw(c81.787,107.06) D2.1@82.068,106.499 ; 81.344,106.616 ccw(c81.787,107.06) D2.1@82.068,106.499 ; 81.344,106.616 ccw(c81.787,107.06) D2.1@82.068,106.499 ; 81.344,106.616 ccw(c81.787,107.06) D2.1@82.068,106.499 ; 81.344,106.616 ccw(c81.787,107.06) D2.1@82.068,106.499 ; 81.344,106.616 ccw(c81.787,107.06) D2.1@82.068,106.499 ; 81.344,106.616 ccw(c81.787,107.06) D2.1@82.068,106.499 ; 81.344,106.616 ccw(c81.787,107.06) D2.1@82.068,106.499 ; 81.344,106.616 ccw(c81.787,107.06) D2.1@82.068,106.499 ; 81.344,106.616 ccw(c81.787,107.06) D2.1@82.068,106.499 ; 81.592,106.368 ccw(c81.953,106.729) D2.1@82.182,106.272 ; 81.592,106.368 ccw(c81.953,106.729) D2.1@82.182,106.272 ; 81.592,106.368 ccw(c81.953,106.729) D2.1@82.182,106.272 ; 81.592,106.368 ccw(c81.953,106.729) D2.1@82.182,106.272 ; 81.592,106.368 ccw(c81.953,106.729) D2.1@82.182,106.272 ; 81.592,106.368 ccw(c81.953,106.729) D2.1@82.182,106.272 ; 81.592,106.368 ccw(c81.953,106.729) D2.1@82.182,106.272 ; 81.592,106.368 ccw(c81.953,106.729) D2.1@82.182,106.272 ; 81.592,106.368 ccw(c81.953,106.729) D2.1@82.182,106.272 ; 81.592,106.368 ccw(c81.953,106.729) D2.1@82.182,106.272 ; D2.1@81.698,106.262 cw(c81.481,106.045) D2.1@81.788,106.045 ; D2.1@81.698,106.262 cw(c81.481,106.045) D2.1@81.788,106.045 ; D2.1@81.698,106.262 cw(c81.481,106.045) D2.1@81.788,106.045 ; D2.1@81.698,106.262 cw(c81.481,106.045) D2.1@81.788,106.045 ; D2.1@81.698,106.262 cw(c81.481,106.045) D2.1@81.788,106.045 ; D2.1@81.698,106.262 cw(c81.481,106.045) D2.1@81.788,106.045 ; D2.1@81.698,106.262 cw(c81.481,106.045) D2.1@81.788,106.045 ; D2.1@81.698,106.262 cw(c81.481,106.045) D2.1@81.788,106.045 ; D2.1@81.698,106.262 cw(c81.481,106.045) D2.1@81.788,106.045 ; D2.1@81.698,106.262 cw(c81.481,106.045) D2.1@81.788,106.045 ; 86.799,113.661 cw(c86.799,112.067) 470.2@87.926,113.194 ; 86.799,113.661 ccw(c86.799,115.256) 470.2@87.926,114.128 ; 86.799,113.661 cw(c86.799,112.067) 470.2@87.926,113.194 ; 86.799,113.661 ccw(c86.799,115.256) 470.2@87.926,114.128 ; 86.799,113.661 cw(c86.799,112.067) 470.2@87.926,113.194 ; 86.799,113.661 ccw(c86.799,115.256) 470.2@87.926,114.128 ; 86.799,113.661 ccw(c86.799,115.256) 470.2@87.926,114.128 ; 86.799,113.661 cw(c86.799,112.067) 470.2@87.926,113.194 ; 86.799,113.661 ccw(c86.799,115.256) 470.2@87.926,114.128 ; 86.799,113.661 cw(c86.799,112.067) 470.2@87.926,113.194 ; 86.799,113.661 ccw(c86.799,115.256) 470.2@87.926,114.128 ; 86.799,113.661 cw(c86.799,112.067) 470.2@87.926,113.194 ; 86.799,113.661 ccw(c86.799,115.256) 470.2@87.926,114.128 ; 86.799,113.661 cw(c86.799,112.067) 470.2@87.926,113.194 ; 86.799,113.661 ccw(c86.799,115.256) 470.2@87.926,114.128 ; 86.799,113.661 cw(c86.799,112.067) 470.2@87.926,113.194 ; 86.799,113.661 ccw(c86.799,115.256) 470.2@87.926,114.128 ; 86.799,113.661 cw(c86.799,112.067) 470.2@87.926,113.194 ; 86.799,113.661 ccw(c86.799,115.256) 470.2@87.926,114.128 ; 86.799,113.661 cw(c86.799,112.067) 470.2@87.926,113.194 ; 87.412,113.661 cw(c87.412,112.68) 470.2@88.106,113.374 ; 87.412,113.661 ccw(c87.412,114.642) 470.2@88.106,113.949 ; 87.412,113.661 cw(c87.412,112.68) 470.2@88.106,113.374 ; 87.412,113.661 ccw(c87.412,114.642) 470.2@88.106,113.949 ; 87.412,113.661 cw(c87.412,112.68) 470.2@88.106,113.374 ; 87.412,113.661 ccw(c87.412,114.642) 470.2@88.106,113.949 ; 87.412,113.661 ccw(c87.412,114.642) 470.2@88.106,113.949 ; 87.412,113.661 cw(c87.412,112.68) 470.2@88.106,113.374 ; 87.412,113.661 ccw(c87.412,114.642) 470.2@88.106,113.949 ; 87.412,113.661 cw(c87.412,112.68) 470.2@88.106,113.374 ; 87.412,113.661 ccw(c87.412,114.642) 470.2@88.106,113.949 ; 87.412,113.661 cw(c87.412,112.68) 470.2@88.106,113.374 ; 87.412,113.661 ccw(c87.412,114.642) 470.2@88.106,113.949 ; 87.412,113.661 cw(c87.412,112.68) 470.2@88.106,113.374 ; 87.412,113.661 ccw(c87.412,114.642) 470.2@88.106,113.949 ; 87.412,113.661 cw(c87.412,112.68) 470.2@88.106,113.374 ; 87.412,113.661 ccw(c87.412,114.642) 470.2@88.106,113.949 ; 87.412,113.661 cw(c87.412,112.68) 470.2@88.106,113.374 ; 87.412,113.661 ccw(c87.412,114.642) 470.2@88.106,113.949 ; 87.412,113.661 cw(c87.412,112.68) 470.2@88.106,113.374